# Altium PCB PCB_Sensores_PIC24.PcbDoc (part 2 of 2)
Units mm, origin at the board's own origin, x right, y up, seen from the top; angles counter-clockwise.
Board outline 86.12 x 83.94 mm, 4 copper layers (Top Layer, Layer 1, Layer 4, Bottom Layer), stack 0.603 mm thick; 128 components, 84 nets, 499 pads, 63 vias.
Unrouted connection lines stored in the file: 68.
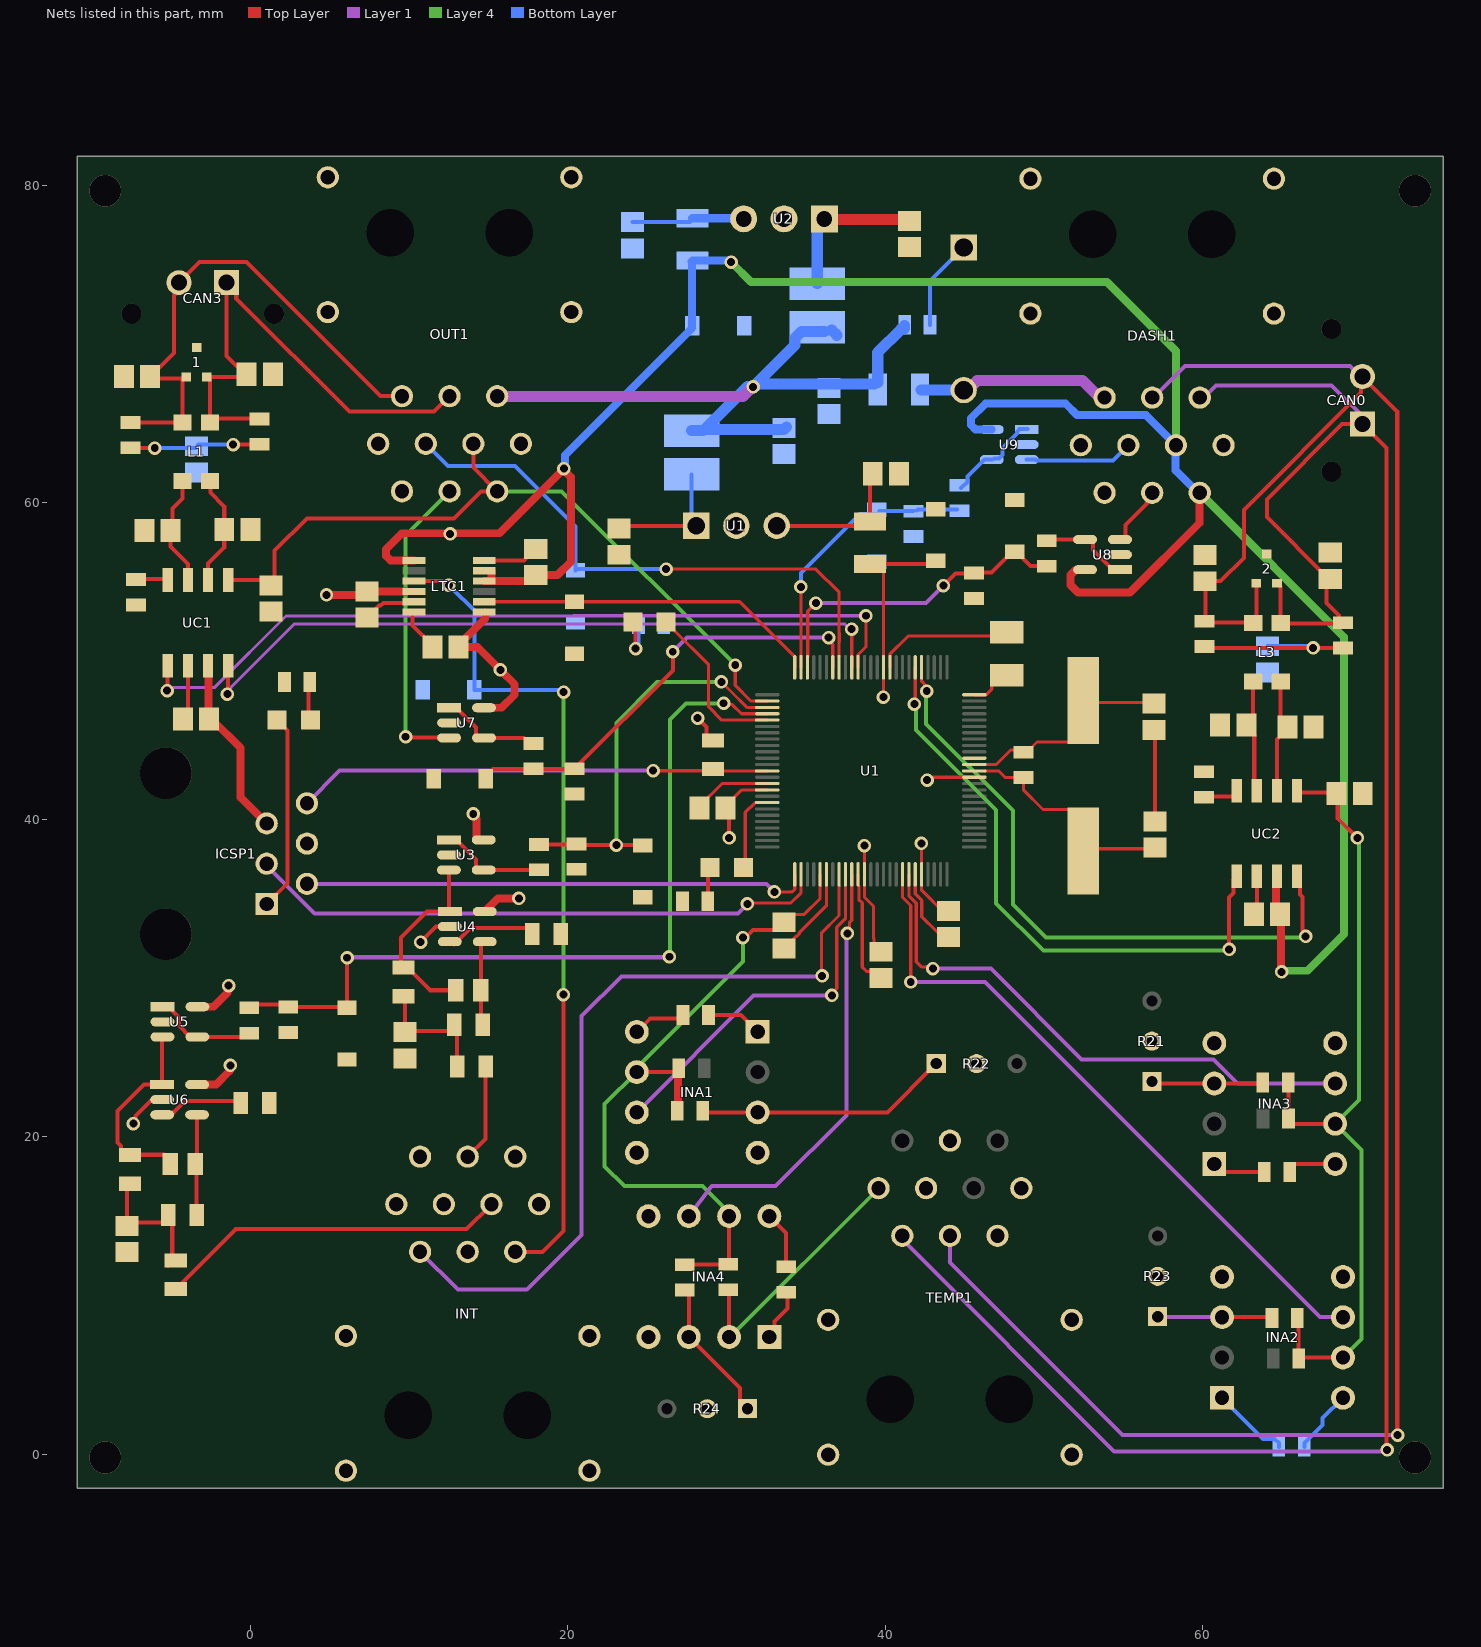
[diagram p4: the nets of this part, all layers, seen from the top]

## Via types
v1: diameter 0.85, hole 0.5, Top Layer to Bottom Layer, 59 vias
v2: diameter 2, hole 2, Top Layer to Bottom Layer, 4 vias

## Nets (pads, with @x,y where several pads share a name; then routed paths per layer and width w, separated by ;. In a path a pad name is that pad's centre, name@x,y a point inside that pad or via, vN(x,y) a via of type N, cw(c..) or ccw(c..) an arc to the next point about the centre after c; other vN are vias at no path point) (continued)
3.3V: C7.1 C8.1 C10.1 C15.1 CC3.2 CC4.2 F2.2 INA1.7 INA2.7 INA3.7 INA4.7 OUT1.3 OUT1.6 R1.1 R13.2 R14.1 R15.2 R16.1 R17.2 R18.1 R19.2 R20.1 U1.2@32.57,47.48 U1.16 U1.30 U1.37 U1.46 U1.62 U1.86 UC1.5 UC2.5 Z2.1 | length 178.2
  Top Layer w0.2: C8.1@29.98,41.09 30.179,41.09 30.969,41.88 U1.16@32.57,41.88 ; v1(30.55,49.74) 30.55,48.47 31.534,47.486 31.889,47.486 31.895,47.48 U1.2@32.57,47.48 ; C15.1@33.61,33.536 34.092,34.018 34.878,34.018 35.895,35.035 U1.30@35.895,36.555 ; v1@38.695,38.365 U1.37@38.695,36.555 38.695,35.105 39.272,34.528 39.272,32.518 39.304,32.486 39.304,31.876 C10.1@39.67,31.51 ; F2.2@39.423,56.126 39.895,55.655 U1.86@39.895,49.605 v1@39.895,47.742 ; v1@42.295,38.501 U1.46@42.295,36.555 42.295,35.88 42.295,35.55 42.802,35.043 43.329,34.516 C7.1@43.43,34.516 ; v1(42.64,42.5) 42.816,42.5 42.996,42.68 U1.62@45.62,42.68
  Top Layer w0.254: UC1.5@-1.415,54.685 UC1.5@-1.415,55.11 0.59,55.11 CC3.2@0.691,55.211 ; CC3.2@1.515,54.89 1.515,56.965 3.54,58.99 12.82,58.99 14.53,60.7 OUT1.3@15.54,60.7 14.04,62.2 OUT1.6@14.04,63.56 ; INA1.7@24.46,23.96 24.59,24.09 26.75,24.09 26.94,24.28 R16.1@26.99,24.33 ; R19.2@27.37,11.95 R20.1@30.11,11.95 ; v1(28.18,46.41) 28.75,45.84 28.75,45.323 29.073,45 R1.1@29.14,45 ; C8.1@29.94,40.75 30.16,40.53 v1(30.16,38.86) ; R20.1@30.11,11.97 30.16,12.02 INA4.7@30.16,15.01 ; v1(31.03,32.57) 31.191,32.57 31.657,33.035 33.11,33.035 C15.1@33.61,33.536 ; v1(38.689,38.371) v1@38.695,38.365 ; F2.2@39.05,56.126 39.423,56.126 Z2.1@42.963,56.126 ; v1(39.888,47.735) v1@39.895,47.742 ; v1(42.282,38.513) v1@42.295,38.501 ; Z2.1@42.954,56.253 Z2.1@43.09,56.39 ; R13.2@65.29,23.32 65.42,23.19 R14.1@65.42,21.17 65.42,21.103 65.693,20.83 INA3.7@68.37,20.83 68.41,20.83 INA3.7@68.61,21.03 ; UC2.5@65.95,41.73 68.055,41.73 CC4.2@68.07,41.745 ; R17.2@66.1,8.59 66.07,8.56 R18.1@66.07,6.04 66.13,6.1 INA2.7@68.86,6.1 69.11,6.1 INA2.7@69.13,6.08 ; CC4.2@68.454,41.65 68.53,41.574 68.53,40.09 v1(69.77,38.85)
  Top Layer w0.5: R15.2@26.89,21.655 26.94,21.705 R16.1@26.94,24.28
  Layer 4 w0.254: OUT1.3@15.65,60.77 15.72,60.7 19.59,60.7 v1(30.55,49.74) ; INA4.7@30.16,15.01 30.16,15.23 28.49,16.9 23.56,16.9 22.32,18.14 22.32,22.07 INA1.7@24.34,24.09 24.34,24.372 31.03,31.062 v1(31.03,32.57) ; INA3.7@68.5,20.7 70.02,19.18 70.02,7.26 INA2.7@68.86,6.1 ; INA3.7@68.52,20.72 68.52,20.98 69.88,22.34 69.88,38.74 v1(69.77,38.85)
4+: INA4.2 R20.2 TEMP1.7 | length 16.1
  Top Layer w0.254: R20.2@30.11,10.37 R20.2@30.16,10.32 ; INA4.2@30.16,7.39 R20.2@30.16,10.32 ; R20.2@30.167,10.313 R20.2@30.16,10.32
  Layer 4 w0.254: INA4.2@30.25,7.42 TEMP1.7@39.5,16.67
24V: C3.1 C4.1 F3.1 L2.1 L4.1 OUT1.10 RV1.1 | length 45.1
  Layer 1 w0.7: OUT1.10@15.6,66.69 31.039,66.69 31.639,67.29 v1(31.68,67.29)
  Bottom Layer w0.7: L2.1@27.8,64.525 28.525,64.525 L2.1@28.61,64.61 ; v1(31.68,67.29) 34.32,69.93 34.32,70.37 34.73,70.78 L4.1@36.17,70.78 ; v1@31.81,67.32 31.32,67.32 L2.1@28.61,64.61 ; v1@31.94,67.462 36.45,67.462 F3.1@39.308,67.462 ; C4.1@33.77,64.75 33.63,64.61 L2.1@28.61,64.61 ; L4.1@36.63,70.86 L4.1@36.947,70.543 ; F3.1@39.53,67.565 39.53,69.44 41.015,70.925 41.18,70.925 41.23,70.975 RV1.1@41.23,71.14
+5: C19.1 C20.1 C21.1 CC1.1 CC2.1 DASH1.3 DASH1.6 F1.2 ICSP1.5 INT.3 INT.6 INT.9 LTC1.1 LTC1.4 LTC1.5 LTC1.7 LTC1.10 U3.5 U4.5 U5.5 U6.5 U7.5 U8.5 U9.5 UC1.3 UC2.3 Z1.1 | length 196
  Top Layer w0.5: U6.5@-3.379,23.3 -2.19,23.3 -1.346,24.144 -1.346,24.445 v1(-1.279,24.512) ; U5.5@-3.36,28.21 -2.34,28.21 -1.458,29.092 -1.458,29.474 v1(-1.391,29.541) ; CC1.1@-2.66,46.55 -2.66,46.485 -2.45,46.275 -2.385,46.275 -0.63,44.52 -0.63,41.405 ICSP1.5@1.01,39.765 ; UC1.3@-2.66,49.39 -2.66,47.168 -2.655,47.163 CC1.1@-2.655,46.825 ; v1(4.781,54.179) 7.124,54.179 C19.1@7.34,54.396 7.345,54.39 LTC1.10@9.825,54.39 ; LTC1.7@10.298,56.345 8.828,56.345 8.535,56.638 8.535,57.052 9.543,58.06 v1@12.57,58.06 ; INT.3@10.541,18.76 INT.3@10.68,18.76 ; v1(12.57,58.02) v1@12.57,58.06 ; v1(14.03,40.37) 14.03,40.275 14.249,40.056 14.249,38.763 14.283,38.73 U3.5@14.697,38.73 ; U7.5@14.71,47.06 15.82,47.06 16.643,47.883 16.643,48.537 v1(15.74,49.44) 15.74,49.45 14.29,50.9 C20.1@13.106,50.9 13.106,51.001 14.79,52.685 LTC1.1@14.79,53.07 ; LTC1.4@14.722,55.045 LTC1.4@15.225,55.045 ; U4.5@14.756,34.21 15.592,35.046 v1(16.909,35.046) ; LTC1.5@15.184,55.67 15.184,55.086 LTC1.4@15.225,55.045 ; C21.1@18.136,55.59 C21.1@17.97,55.424 ; U8.5@52.6,55.762 52.586,55.748 52.005,55.748 51.69,55.433 51.69,54.792 52.16,54.322 55.432,54.322 59.803,58.693 59.803,60.583 DASH1.3@59.83,60.61 ; UC2.3@64.65,36.05 64.65,34.286 64.943,33.993 64.943,30.457 v1(64.99,30.41) ; v1@12.57,58.06 15.68,58.06 v1(19.75,62.13) 19.75,62.035 20.19,61.595 20.19,56.27 19.344,55.424 C21.1@17.97,55.424 ; LTC1.4@15.225,55.045 17.199,55.045 17.201,55.047 17.593,55.047 C21.1@17.97,55.424
  Layer 4 w0.5: v1(30.291,75.15) 31.541,73.9 53.98,73.9 58.33,69.55 DASH1.6@58.33,63.61 ; DASH1.3@60.076,60.316 60.124,60.316 68.93,51.51 68.93,32.78 66.627,30.477 65.057,30.477 v1(64.99,30.41)
  Bottom Layer w0.5: v1(19.75,62.13) 19.817,62.197 19.817,62.977 27.835,70.995 Z1.1@27.835,71.15 27.835,75.145 F1.2@27.79,75.19 ; F1.2@27.85,75.246 30.1,75.246 30.21,75.136 v1@30.21,75.07 ; U9.5@46.72,64.6 45.69,64.6 45.397,64.893 45.397,65.307 46.32,66.23 51.38,66.23 52.1,65.51 56.43,65.51 DASH1.6@58.33,63.61 ; DASH1.6@58.31,63.51 58.31,62.01 DASH1.3@59.81,60.51
AN_AUX1: R38.1 R39.1 U1.98 Z7.1 | length 19.1
  Top Layer w0.2: U1.98@35.118,50.253 35.118,53.138 v1(35.632,53.652)
  Top Layer w0.254: v1(43.675,54.752) 44.443,55.52 R39.1@45.41,55.52 ; R39.1@45.92,55.58 46.7,55.58 48.005,56.885 Z7.1@48.16,56.885 ; Z7.1@48.37,56.76 48.44,56.76 48.643,56.557 48.643,56.511 49.174,55.98 R38.1@50.18,55.98
  Layer 1 w0.254: v1(35.632,53.652) 42.575,53.652 v1(43.675,54.752)
AN_AUX2: R40.1 R41.1 U1.99 Z8.1 | length 17.2
  Top Layer w0.2: v1(34.68,54.68) 34.695,54.665 U1.99@34.695,49.605
  Bottom Layer w0.254: v1(34.68,54.68) 34.68,55.54 38.42,59.28 Z8.1@39.72,59.28 ; Z8.1@39.63,59.45 R41.1@41.78,59.45 ; R41.1@41.99,59.48 42.06,59.55 R40.1@44.53,59.55
AUX: INT.10 U1.33 | length 48.7
  Top Layer w0.2: v1(36.02,30.16) 35.98,30.2 35.98,32.853 37.086,33.959 U1.33@37.086,35.8
  Layer 1 w0.254: INT.10@10.68,12.76 13.07,10.37 17.405,10.37 20.865,13.83 20.865,27.615 23.37,30.12 35.98,30.12 v1(36.02,30.16)
AUX1: DASH1.2 U8.3 | length 3.8
  Top Layer w0.254: U8.3@54.801,57.662 54.993,57.662 55.14,57.809 55.14,58.58 56.49,59.93 56.49,59.96 56.93,60.4 DASH1.2@56.96,60.4
AUX2: DASH1.5 U9.3 | length 6.8
  Bottom Layer w0.254: U9.3@48.921,62.7 49.474,62.7 49.541,62.633 54.353,62.633 55.19,63.47 DASH1.5@55.35,63.47
CANH_0: 2.1 CAN0.2 CHB4.1 DASH1.9 L3.3 RCH2.2 TEMP1.9 | length 141.7
  Top Layer w0.254: CHB4.1@60.15,55.034 61.144,55.034 62.61,56.5 62.61,59.54 69.993,66.923 69.993,67.848 CAN0.2@70.085,67.94 CAN0.2@70.085,67.811 ; RCH2.2@60.19,52.47 60.2,52.48 CHB4.1@60.2,54.86 ; RCH2.2@60.51,52.44 L3.3@63.18,52.44 ; L3.3@63.2,52.39 63.4,52.59 63.4,54.81 2.1@63.52,54.93 ; CAN0.2@70.29,67.82 70.29,67.735 72.28,65.745 72.28,1.232 v1(72.302,1.21)
  Layer 1 w0.254: TEMP1.9@44.08,13.77 44.08,12.09 54.96,1.21 v1(72.302,1.21) ; DASH1.9@56.81,66.51 58.91,68.61 69.316,68.61 69.986,67.94 CAN0.2@70.085,67.94
CANH_3: 1.1 CAN3.2 CHB2.1 L1.3 OUT1.8 RCH1.2 | length 32.4
  Top Layer w0.254: RCH1.2@-7.048,65.04 L1.3@-4.295,65.04 -4.295,67.705 1.1@-4.215,67.785 ; CHB2.1@-6.298,67.867 -5.937,68.228 -5.937,68.323 -4.84,69.42 -4.84,73.053 -4.772,73.121 -4.772,73.608 CAN3.2@-4.52,73.86 ; CHB2.1@-6.25,67.82 -4.25,67.82 1.1@-4.215,67.785 ; CAN3.2@-4.36,74.03 -4.35,74.03 -3.23,75.15 -0.26,75.15 8.19,66.7 OUT1.8@9.54,66.7 ; 1.1@-4.17,67.74 1.1@-4.215,67.785 ; 1.1@-4.17,67.82 1.1@-4.01,67.82
CANL_0: 2.2 CAN0.1 CLB4.1 DASH1.10 L3.2 RCL2.2 TEMP1.10 | length 138.8
  Top Layer w0.254: 2.2@64.72,55.04 64.72,54.905 64.93,54.695 L3.2@64.93,52.39 64.95,52.37 RCL2.2@68.87,52.37 ; RCL2.2@68.733,52.41 68.6,52.543 68.6,52.88 67.83,53.65 67.83,55.313 64.07,59.073 64.07,60.2 68.81,64.94 CAN0.1@70.085,64.94 71.6,63.425 71.6,0.89 71.609,0.881 71.609,0.311 v1(71.64,0.28)
  Layer 1 w0.254: TEMP1.10@40.57,13.54 TEMP1.10@41.08,13.54 ; TEMP1.10@41.08,13.77 TEMP1.10@41.08,13.54 ; DASH1.10@59.81,66.51 59.982,66.51 60.852,67.38 68.145,67.38 CAN0.1@70.655,64.87 ; v1(71.64,0.28) 71.54,0.18 54.44,0.18 TEMP1.10@41.08,13.54
CANL_3: 1.2 CAN3.1 CLB2.1 L1.2 OUT1.9 RCL1.2 | length 33.1
  Top Layer w0.254: 1.2@-2.755,67.915 CLB2.1@-0.48,67.915 ; 1.2@-2.69,67.87 -2.565,67.745 L1.2@-2.565,65.07 ; L1.2@-2.4,65.07 -2.18,65.29 RCL1.2@0.404,65.29 ; CLB2.1@-0.48,67.83 CLB2.1@-0.48,67.915 ; CLB2.1@-0.21,67.915 CLB2.1@-0.13,67.995 ; OUT1.9@12.54,66.7 11.563,65.723 6.237,65.723 -0.91,72.87 -0.91,73.25 CAN3.1@-1.3,73.64 ; CAN3.1@-1.52,73.86 CAN3.1@-1.3,73.64 ; CAN3.1@-1.52,73.86 -1.3,73.86 CAN3.1@-1.3,73.64 ; CAN3.1@-1.52,73.86 -1.52,69.225 -0.48,68.185 CLB2.1@-0.48,67.915
CAUDAL_A: LTC1.2 U1.100 Z10.1 | length 21.7
  Top Layer w0.2: LTC1.2@14.722,53.745 20.58,53.745 30.825,53.745 34.295,50.275 U1.100@34.295,49.605
CAUDAL_P: INT.8 LTC1.9 Z6.1 | length 52.9
  Top Layer w0.254: LTC1.9@10.297,55.044 12.074,55.044 12.339,54.78 v1(12.5,54.78) ; INT.8@16.68,12.76 18.41,12.76 19.71,14.06 v1(19.71,28.975)
  Layer 4 w0.254: v1(19.71,28.975) v1@19.71,48.176
  Bottom Layer w0.254: v1@12.66,54.78 12.66,54.62 14.105,53.175 Z6.1@14.105,48.19 19.429,48.19 19.571,48.048 v1(19.733,48.048)
DIRECCION: OUT1.5 U1.93 Z9.1 | length 35.7
  Top Layer w0.2: v1(26.19,55.8) 35.633,55.8 37.095,54.338 37.095,51.766 37.108,51.753 37.108,51.194 37.095,51.181 U1.93@37.095,50.253
  Bottom Layer w0.254: OUT1.5@11.04,63.7 12.43,62.31 16.66,62.31 20.48,58.49 Z9.1@20.48,55.725 20.518,55.762 20.555,55.8 v1(26.19,55.8)
GND: 1.3 2.3 C1.2 C2.2 C3.2 C4.2 C5.2 C6.2 C7.2 C8.2 C10.2 C13.2 C14.2 C15.2 C16.2 C19.2 C20.2 C21.2 C24.2 CAP1.1 CB1.2 CB2.2 CC1.2 CC2.2 CC3.1 CC4.1 CHB1.2 CHB2.2 CHB3.2 CHB4.2 CLB1.2 CLB2.2 CLB3.2 CLB4.2 DASH1.1 DASH1.4 DASH1.7 DASH1.MH1 DASH1.MH2 DASH1.MH5 DASH1.MH6 DR1.1 ICSP1.4 INA1.4 INA1.5 INA2.4 INA2.5 INA3.4 INA3.5 INA4.4 INA4.5 INT.1 INT.4 INT.7 INT.MH1 INT.MH2 INT.MH5 INT.MH6 LTC1.6 LTC1.11 LTC1.12 OUT1.1 OUT1.4 OUT1.7 OUT1.MH1 OUT1.MH2 OUT1.MH5 OUT1.MH6 R2.2 R3.2 R6.1 R7.1 R8.1 R10.2 R21.2 R22.2 R23.2 R24.2 R31.2 R32.2 R33.2 R37.2 R39.2 R41.2 RV1.2 TEMP1.2 TEMP1.4 TEMP1.6 TEMP1.8 TEMP1.MH1 TEMP1.MH2 TEMP1.MH5 TEMP1.MH6 U1.2@30.62,58.53 U1.15 U1.31 U1.36 U1.45 U1.65 U1.75 U2.2 U3.2 U4.2 U5.2 U6.2 U7.2 U8.2 U9.2 UC1.2 UC2.2 Z1.2 Z2.2 Z3.2 Z4.2 Z5.2 Z6.2 Z7.2 Z8.2 Z9.2 Z10.2 | length 54.2
  Top Layer w0.2: C8.2@28.288,40.75 28.288,40.851 29.718,42.28 U1.15@31.922,42.28 ; C15.2@33.61,31.884 33.711,31.884 34.238,32.412 34.238,32.512 34.384,32.658 34.442,32.658 34.588,32.805 34.588,32.862 36.295,34.569 U1.31@36.295,35.907 ; U1.36@38.295,36.555 38.295,35.88 38.345,35.83 38.345,34.96 38.55,34.755 38.55,30.71 38.819,30.441 39.102,30.441 39.457,30.086 C10.2@39.457,29.803 ; U1.45@41.899,35.907 41.899,35.328 42.31,34.917 42.31,33.883 43.329,32.864 C7.2@43.43,32.864 ; U1.75@45.62,47.88 46.37,47.88 46.722,48.232 46.722,48.537 47.195,49.01 CAP1.1@47.66,49.01
  Top Layer w0.254: v1(-7.387,20.838) -7.273,20.952 -7.273,21.307 -6.291,22.289 -5.641,22.289 U6.2@-5.58,22.35 ; CC1.2@-3.955,46.701 UC1.2@-3.955,49.71 ; C19.2@7.34,52.744 7.441,52.744 7.941,53.245 7.941,53.343 8.09,53.491 8.183,53.491 8.361,53.67 LTC1.11@9.703,53.67 ; LTC1.12@10.2,53.08 10.2,52.255 11.454,51.001 C20.2@11.454,50.9 ; v1(10.709,32.286) 11.682,33.26 U4.2@12.555,33.26 ; LTC1.6@14.712,56.335 17.22,56.335 17.369,56.484 17.369,56.575 17.869,57.076 C21.2@17.97,57.076 ; C14.2@57.01,39.896 57.01,45.75 C13.2@57.02,45.76 ; UC2.2@63.34,36.16 63.425,36.075 63.425,34.12 CC2.2@63.345,34.04
  Bottom Layer w0.254: RV1.2@42.83,71.2 42.83,73.96 44.94,76.07 DR1.1@44.94,76.09
  other v2: -9.16,-0.2 73.4,-0.2 -9.16,79.65 73.4,79.65
LED_0: D3.1 U1.18 | length 5.2
  Top Layer w0.2: D3.1@31.07,36.99 31.18,37.1 31.18,40.46 31.8,41.08 U1.18@32.57,41.08
LED_1: D4.1 U1.5 | length 10.5
  Top Layer w0.2: D4.1@26.19,52.45 26.69,51.95 28.87,49.77 28.87,47.115 29.705,46.28 U1.5@32.57,46.28
MCLR: ICSP1.6 R1.2 U1.13 | length 29.6
  Top Layer w0.2: v1(25.37,43.09) 29.03,43.09 R1.2@29.14,43.2 ; R1.2@29.44,43.14 29.5,43.08 U1.13@32.57,43.08
  Layer 1 w0.254: ICSP1.6@3.55,41.035 5.605,43.09 v1(25.37,43.09)
NetC1_1: C1.1 L4.2 U2.1 | length 9.9
  Top Layer w0.254: C1.1@41.446,77.84 C1.1@41.54,77.746
  Top Layer w0.7: U2.1@35.97,77.84 C1.1@41.446,77.84
  Bottom Layer w0.254: U2.1@35.72,78 U2.1@35.76,78.04
  Bottom Layer w0.7: L4.2@35.72,73.795 U2.1@35.72,78
NetC2_1: C2.1 F1.1 U2.3 | length 7
  Bottom Layer w0.254: C2.1@24.08,77.672 27.692,77.672 F1.1@27.82,77.8 ; F1.1@27.85,77.913 F1.1@27.856,77.92 ; U2.3@30.45,77.92 U2.3@30.89,77.48
  Bottom Layer w0.555: F1.1@27.856,77.92 U2.3@30.45,77.92
NetC5_1: C5.1 L2.2 U1.1@28.08,58.53 | length 8.3
  Top Layer w0.254: C5.1@23.11,58.53 U1.1@28.08,58.53 ; C5.1@23.18,58.65 C5.1@23.21,58.68
  Bottom Layer w0.254: L2.2@27.8,61.775 27.8,58.79 U1.1@28.02,58.57
NetC6_1: C6.1 F2.1 U1.3@33.16,58.53 | length 9.5
  Top Layer w0.254: U1.3@33.16,58.53 38.83,58.53 F2.1@39.05,58.75 ; F2.1@39.05,58.793 39.05,62.16 C6.1@39.12,62.23
  Bottom Layer w0.254: U1.3@33.16,58.69 U1.3@33.19,58.66
NetC9_1: C9.1 R29.2 U4.4 | length 5.7
  Top Layer w0.254: R29.2@14.726,27.15 14.506,27.37 C9.1@14.506,29.25 14.506,32.163 14.753,32.41 U4.4@15.016,32.41
NetC9_2: C9.2 R5.2 U3.3 U4.1 | length 12.1
  Top Layer w0.254: R5.2@9.796,30.68 R5.2@9.636,30.68 9.49,30.826 9.49,32.57 11.13,34.21 U4.1@12.555,34.21 ; R5.2@9.886,30.68 11.316,29.25 C9.2@12.926,29.25 ; U4.1@12.496,34.36 12.496,36.89 U3.3@12.546,36.94
NetC16_1: C16.1 R5.1 R28.2 R29.1 | length 7.9
  Top Layer w0.254: R5.1@9.666,28.72 9.736,28.65 C16.1@9.736,26.606 ; C16.1@9.886,26.67 12.503,26.67 12.826,26.993 R29.1@12.826,27.08 ; R28.2@12.786,24.59 R28.2@12.886,24.49 ; R29.1@12.846,26.88 13.016,26.71 R28.2@13.016,24.45
NetC18_1: C18.1 R35.2 U6.4 | length 6.9
  Top Layer w0.254: R35.2@-3.73,14.62 -3.407,14.943 -3.407,17.983 C18.1@-3.32,18.07 ; C18.1@-3.49,18.3 -3.379,18.411 -3.379,21.529 U6.4@-3.39,21.54
NetC18_2: C18.2 R30.2 U5.3 U6.1 | length 12.4
  Top Layer w0.254: R30.2@-7.6,18.86 -7.85,18.86 -8.173,19.183 -8.173,19.433 -8.38,19.64 -8.38,21.64 -6.72,23.3 U6.1@-5.58,23.3 -5.58,26.163 -5.493,26.25 U5.3@-5.48,26.25 ; R30.2@-7.6,18.88 -5.435,18.88 -5.13,18.575 C18.2@-5.13,18.5
NetC24_1: C24.1 R30.1 R34.2 R35.1 | length 8.1
  Top Layer w0.254: R30.1@-7.79,17.015 -7.79,14.62 R35.1@-5.53,14.62 ; R34.2@-5.2,11.88 -4.943,12.137 -4.943,14.833 R35.1@-5.2,15.09
NetCB1_1: CB1.1 RCH1.1 RCL1.1 | length 8
  Top Layer w0.254: RCH1.1@-7.58,63.44 -6.059,63.44 v1(-6.044,63.425) ; v1(-1.1,63.65) -1.09,63.66 RCL1.1@0.55,63.66
  Bottom Layer w0.254: v1(-6.044,63.425) -3.505,63.425 CB1.1@-3.46,63.47 ; CB1.1@-3.33,63.62 -3.3,63.65 v1(-1.1,63.65)
NetCB2_1: CB2.1 RCH2.1 RCL2.1 | length 11.5
  Top Layer w0.254: RCH2.1@60.13,50.92 60.23,50.82 RCL2.1@68.63,50.82
  Bottom Layer w0.254: CB2.1@64.1,50.936 66.866,50.936 v1(66.974,50.828)
NetCHB1_1: CHB1.1 L1.4 UC1.7 | length 7
  Top Layer w0.254: CHB1.1@-5.05,58.24 -5.05,58.02 -5.05,57.21 -3.955,56.115 UC1.7@-3.955,55.11 ; CHB1.1@-4.93,58.24 -4.93,59.612 -4.295,60.247 L1.4@-4.295,61.36
NetCHB3_1: CHB3.1 L3.4 UC2.7 | length 7.1
  Top Layer w0.254: CHB3.1@62.86,45.83 63.2,46.17 L3.4@63.2,48.71 ; CHB3.1@62.9,45.65 62.975,45.65 63.266,45.359 63.266,41.989 UC2.7@63.425,41.83
NetCLB1_1: CLB1.1 L1.1 UC1.6 | length 7
  Top Layer w0.254: UC1.6@-2.685,55.11 -2.685,56.145 -1.666,57.164 CLB1.1@-1.666,58.3 -1.666,59.756 -2.538,60.628 -2.538,61.333 L1.1@-2.565,61.36
NetCLB3_1: CLB3.1 L3.1 UC2.6 | length 7.3
  Top Layer w0.254: UC2.6@64.695,41.83 64.695,45.06 65.305,45.67 CLB3.1@65.34,45.67 ; L3.1@64.93,48.71 64.93,46.12 CLB3.1@65.34,45.71
NetD2_2: D2.2 R6.2 | length 1.9
  Top Layer w0.254: R6.2@3.57,48.67 3.65,48.59 D2.2@3.65,46.79
NetD3_2: D3.2 R7.2 | length 2.1
  Top Layer w0.254: R7.2@28.82,34.86 28.82,36.71 D3.2@28.98,36.87
NetD4_2: D4.2 R8.2 | length 3.5
  Top Layer w0.254: D4.2@24.12,52.57 24.265,52.425 v1(24.265,50.792)
  Bottom Layer w0.254: v1(24.265,50.792) 24.45,50.977 R8.2@24.45,52.26 ; R8.2@24.415,52.225 R8.2@24.45,52.26 ; R8.2@24.45,52.33 R8.2@24.45,52.26
NetDASH1_8: DASH1.8 DR1.2 F3.2 | length 12.3
  Layer 1 w0.7: DR1.2@44.95,67.08 45.207,67.08 45.807,67.68 52.451,67.68 53.387,66.744 53.576,66.744 DASH1.8@53.81,66.51
  Bottom Layer w0.7: F3.2@42.27,67.08 DR1.2@44.95,67.08
NetINA1_1: INA1.1 R11.2 | length 3.5
  Top Layer w0.254: R11.2@28.86,27.69 30.9,27.69 INA1.1@31.96,26.63
NetINA1_8: INA1.8 R11.1 | length 3.3
  Top Layer w0.254: INA1.8@24.34,26.63 25.19,27.48 R11.1@27.275,27.48
NetINA2_1: INA2.1 R12.2 | length 5
  Bottom Layer w0.254: INA2.1@61.24,3.56 63.832,0.968 64.547,0.968 64.82,0.695 R12.2@64.82,0.47
NetINA2_8: INA2.8 R12.1 | length 4.1
  Bottom Layer w0.254: R12.1@66.42,0.47 66.42,0.695 67.573,1.848 67.573,2.273 INA2.8@68.86,3.56
NetINA3_1: INA3.1 R25.2 | length 3.3
  Top Layer w0.254: INA3.1@60.78,18.16 61.14,17.8 R25.2@63.9,17.8
NetINA3_8: INA3.8 R25.1 | length 3.3
  Top Layer w0.254: R25.1@65.5,17.8 65.5,18.017 65.773,18.29 68.39,18.29 INA3.8@68.47,18.21
NetINA4_1: INA4.1 R26.2 | length 3.2
  Top Layer w0.254: INA4.1@32.7,7.39 33.012,7.702 33.012,8.372 33.83,9.19 R26.2@33.83,10.1
NetINA4_8: INA4.8 R26.1 | length 3.5
  Top Layer w0.254: INA4.8@32.88,14.91 32.88,14.83 33.76,13.95 R26.1@33.76,11.82
NetR2_1: R2.1 UC1.8 | length 1.8
  Top Layer w0.254: R2.1@-7.08,55.16 -5.26,55.16 UC1.8@-5.24,55.18
NetR3_1: R3.1 UC2.8 | length 2.2
  Top Layer w0.254: R3.1@60.09,41.47 62.06,41.47 UC2.8@62.22,41.63
NetR9_2: R9.2 U7.1 U7.4 | length 6.5
  Top Layer w0.254: U7.1@12.63,47.15 12.886,47.15 14.209,45.827 14.209,45.307 14.356,45.16 U7.4@14.71,45.16 17.245,45.16 17.575,44.83 R9.2@17.89,44.83
NetR10_1: R10.1 U4.3 | length 5.9
  Top Layer w0.254: U4.3@12.816,32.13 13.866,33.18 17.617,33.18 17.94,32.857 R10.1@17.94,32.68
NetR27_2: R27.2 U3.1 U3.4 | length 6.2
  Top Layer w0.254: U3.1@12.786,38.74 12.952,38.74 14.195,37.497 14.195,36.977 14.342,36.83 U3.4@14.697,36.83 ; U3.4@15.016,36.83 18.176,36.83 R27.2@18.186,36.84
NetR32_1: R32.1 U6.3 | length 5.2
  Top Layer w0.254: U6.3@-5.58,21.4 -5.027,21.4 -4.868,21.559 -4.841,21.559 -4.14,22.26 R32.1@-0.722,22.26
NetR36_2: R36.2 U5.1 U5.4 | length 6.9
  Top Layer w0.254: U5.1@-5.36,28.37 -4.531,27.541 -4.531,27.015 -3.826,26.31 U5.4@-3.36,26.31 0,26.31 R36.2@0.26,26.57
NetR38_2: R38.2 U8.1 U8.4 | length 5.5
  Top Layer w0.254: R38.2@50.18,57.58 50.262,57.662 52.438,57.662 U8.4@52.5,57.6 ; U8.4@52.79,57.59 53.026,57.59 53.101,57.515 53.101,56.995 54.334,55.762 U8.1@54.801,55.762
NetR40_2: R40.2 U9.1 U9.4 | length 6
  Bottom Layer w0.254: R40.2@44.79,60.91 45.178,61.298 45.178,61.625 46.253,62.7 U9.4@46.72,62.7 ; U9.4@46.901,62.776 47.176,62.776 47.403,63.002 47.403,63.443 48.295,64.335 48.295,64.441 48.48,64.626 U9.1@48.982,64.626
OSC1: "OSC 1.2" C14.1 R4.2 U1.63 | length 14.8
  Top Layer w0.2: U1.63@46.268,43.076 47.144,43.076 47.56,42.66 R4.2@48.71,42.66 48.71,41.879 49.946,40.643 51.617,40.643 52.49,39.77 52.49,38.02 52.64,38.17 C14.1@57.47,38.17
OSC2: "OSC 1.1" C13.1 R4.1 U1.64 | length 14
  Top Layer w0.2: U1.64@45.62,43.48 46.994,43.48 47.902,44.388 48.582,44.388 R4.1@48.71,44.26 ; R4.1@48.877,44.202 49.572,44.897 51.617,44.897 52.49,45.77 52.49,47.52 52.626,47.384 C13.1@56.87,47.384
PGC: ICSP1.2 U1.26 | length 32
  Top Layer w0.2: v1(33.02,35.452) 34.146,35.452 34.295,35.601 U1.26@34.295,36.555
  Layer 1 w0.254: ICSP1.2@3.565,35.955 32.517,35.955 v1(33.02,35.452)
PGD: ICSP1.3 U1.27 | length 35.9
  Top Layer w0.2: v1(31.32,34.69) 31.38,34.75 34.046,34.75 34.699,35.403 U1.27@34.699,35.83
  Layer 1 w0.254: ICSP1.3@1.07,37.12 1.07,37.053 4.04,34.084 30.714,34.084 v1(31.32,34.69) v1@31.31,34.7
PGM: D2.1 ICSP1.1 | length 12.4
  Top Layer w0.254: ICSP1.1@1.01,34.685 2.32,35.995 2.32,45.63 D2.1@1.67,46.28
Rx_Can: U1.80 UC2.4 | length 40.7
  Top Layer w0.2: U1.80@42.295,49.605 42.295,48.725 42.496,48.524 42.496,48.234 v1(42.62,48.11)
  Top Layer w0.254: UC2.4@65.965,36.43 66.163,36.232 66.163,35.287 66.32,35.13 66.32,33.001 66.51,32.811 v1(66.51,32.65)
  Layer 4 w0.254: v1(42.62,48.11) 42.575,48.065 42.575,46.045 48.043,40.577 48.043,34.657 50.13,32.57 66.43,32.57 v1(66.51,32.65)
RX_CAN3: U1.91 UC1.4 | length 45.3
  Top Layer w0.2: U1.91@37.892,49.607 v1@37.892,51.952
  Top Layer w0.254: v1(-1.467,47.919) -1.441,47.945 -1.441,49.441 UC1.4@-1.45,49.45 ; v1@37.892,51.952 v1@37.94,52
  Layer 1 w0.2: v1@-1.55,48.04 -1.522,48.04 -1.256,48.306 -1.256,48.334 2.75,52.34 36.521,52.34 36.526,52.336 37.448,52.336 37.774,52.01 v1(37.89,52.01)
SD_amp: R27.1 R33.1 U1.3@32.57,47.08 Z4.1 | length 24.4
  Top Layer w0.2: v1(29.67,48.69) 30.279,48.081 31.28,47.08 U1.3@31.922,47.08
  Top Layer w0.254: R27.1@18.186,38.44 R33.1@20.041,38.44 ; R33.1@20.536,38.47 20.606,38.4 22.91,38.4 v1@23.02,38.29 ; v1(23.05,38.4) 24.54,38.4 Z4.1@24.65,38.29
  Layer 4 w0.254: v1(23.05,38.4) 23.05,46.11 25.63,48.69 v1(29.67,48.69)
SD_ruido: INT.2 R28.1 | length 6.1
  Top Layer w0.254: INT.2@13.68,18.76 14.79,19.87 R28.1@14.79,24.37
SI_amp: R36.1 R37.1 U1.4 Z5.1 | length 51.7
  Top Layer w0.2: v1(29.82,47.34) 29.903,47.257 30.363,47.257 30.94,46.68 U1.4@32.57,46.68
  Top Layer w0.254: R36.1@-0.09,28.14 0.12,28.35 R37.1@2.49,28.35 ; R37.1@2.37,28.19 6.05,28.19 6.08,28.22 v1(6.08,31.3) ; Z5.1@6.19,28.19 Z5.1@6.21,28.21
  Layer 1 w0.254: v1(6.08,31.3) 6.11,31.33 26.37,31.33 v1(26.4,31.36)
  Layer 4 w0.254: v1(26.4,31.36) 26.429,31.389 26.429,46.319 27.45,47.34 v1(29.82,47.34)
SI_ruido: INT.5 R34.1 | length 22.1
  Top Layer w0.254: R34.1@-4.72,10.42 -0.94,14.2 13.62,14.2 15.11,15.69 INT.5@15.2,15.69
T1: INA3.6 U1.44 | length 35.3
  Top Layer w0.2: U1.44@41.495,36.555 41.495,35.199 41.96,34.734 41.96,31.049 42.285,30.724 42.897,30.724 v1(43.01,30.611)
  Layer 1 w0.254: v1(43.01,30.611) 43.011,30.61 46.66,30.61 52.387,24.883 60.689,24.883 62.202,23.37 INA3.6@68.37,23.37
T2: INA1.6 U1.34 | length 22.7
  Top Layer w0.2: v1(36.64,28.92) 36.64,29.057 36.945,29.362 36.945,33.215 37.49,33.76 U1.34@37.49,35.872
  Layer 1 w0.254: INA1.6@24.34,21.55 31.71,28.92 v1(36.64,28.92)
T3: INA2.6 U1.43 | length 43
  Top Layer w0.2: U1.43@41.095,36.555 41.095,35.104 41.61,34.589 v1(41.61,29.77)
  Layer 1 w0.254: v1(41.61,29.77) 46.28,29.77 67.41,8.64 INA2.6@68.86,8.64
T4: INA4.6 U1.35 | length 28
  Top Layer w0.2: v1(37.62,32.84) 37.744,32.964 37.744,33.514 37.895,33.665 U1.35@37.895,36.555
  Layer 1 w0.254: INA4.6@27.62,15.01 29,16.82 29.012,16.832 29.086,16.907 33.097,16.907 37.547,21.357 37.547,32.767 v1(37.62,32.84)
Tx_Can: U1.81 UC2.1 | length 37.8
  Top Layer w0.2: v1(41.837,47.294) 41.895,47.352 U1.81@41.895,49.605
  Top Layer w0.254: v1(61.68,31.83) 61.68,35.1 61.957,35.377 61.957,36.232 UC2.1@62.155,36.43
  Layer 4 w0.254: v1(41.837,47.294) 41.95,47.181 41.95,45.65 46.99,40.61 46.99,34.73 49.975,31.745 61.595,31.745 v1(61.68,31.83)
TX_CAN3: U1.90 UC1.1 | length 50.7
  Top Layer w0.2: U1.90@38.295,49.605 38.295,50.413 38.79,50.908 v1(38.79,52.86)
  Top Layer w0.254: v1(-5.263,48.135) -5.244,48.154 -5.244,49.334 UC1.1@-5.26,49.35
  Layer 1 w0.2: v1(-5.263,48.135) -5.087,48.135 -4.892,48.33 -2.29,48.33 2.225,52.845 20.35,52.845 20.365,52.86 v1(38.79,52.86)
V1: INA3.3 R13.1 R21.1 | length 7
  Top Layer w0.254: R21.1@56.945,23.37 INA3.3@60.75,23.37 63.63,23.37 R13.1@63.71,23.45
  Layer 1 w0.254: R21.1@56.815,23.5 R21.1@56.945,23.37
V2: INA1.3 R15.1 R22.1 | length 16.2
  Top Layer w0.254: R15.1@28.49,21.655 28.595,21.55 INA1.3@31.96,21.55 40.145,21.55 43.055,24.46 R22.1@43.45,24.46
V3: INA2.3 R17.1 R23.1 | length 7.2
  Top Layer w0.254: INA2.3@61.24,8.64 64.32,8.64 R17.1@64.38,8.58
  Layer 1 w0.254: R23.1@57.18,8.67 57.21,8.64 INA2.3@61.24,8.64
V4: INA4.3 R19.1 R24.1 | length 9.1
  Top Layer w0.254: R19.1@27.37,10.35 27.62,10.1 INA4.3@27.62,7.39 30.847,4.163 30.847,3.343 R24.1@31.32,2.87
VCAP: CAP1.2 U1.85 | length 8.8
  Top Layer w0.2: U1.85@40.295,49.605 40.295,50.426 41.441,51.572 CAP1.2@47.76,51.572
ZRACK: OUT1.2 U7.3 | length 19.4
  Top Layer w0.254: v1(9.77,45.23) 9.805,45.195 12.474,45.195 U7.3@12.509,45.16
  Layer 4 w0.254: v1@9.96,45.28 9.77,45.47 9.77,57.93 OUT1.2@12.54,60.7
ZRACK-Reg: R9.1 R31.1 U1.94 Z3.1 | length 28.2
  Top Layer w0.2: v1@36.45,51.39 36.45,51.296 36.695,51.051 U1.94@36.695,49.605
  Top Layer w0.254: Z3.1@14.8,42.54 14.8,42.73 15.28,43.21 R9.1@17.82,43.21 20.5,43.21 R31.1@20.58,43.13 ; R31.1@20.42,43.22 26.609,49.409 v1(26.609,50.59)
  Layer 1 w0.254: v1(26.609,50.59) 27.493,51.474 v1(36.433,51.474)
pads on no net: CAN0. CAN3. DASH1.MH3 DASH1.MH4 ICSP1. INT.MH3 INT.MH4 LTC1.3 LTC1.8 OUT1.MH3 OUT1.MH4 R21.3 R22.3 R23.3 R24.3 TEMP1.MH3 TEMP1.MH4 U1.1@32.57,47.88 U1.6 U1.7 U1.8 U1.9 U1.10 U1.11 U1.12 U1.14 U1.17 U1.19 U1.20 U1.21 U1.22 U1.23 U1.24 U1.25 U1.28 U1.29 U1.32 U1.38 U1.39 U1.40 U1.41 U1.42 U1.47 U1.48 U1.49 U1.50 U1.51 U1.52 U1.53 U1.54 U1.55 U1.56 U1.57 U1.58 U1.59 U1.60 U1.61 U1.66 U1.67 U1.68 U1.69 U1.70 U1.71 U1.72 U1.73 U1.74 U1.76 U1.77 U1.78 U1.79 U1.82 U1.83 U1.84 U1.87 U1.88 U1.89 U1.92 U1.95 U1.96 U1.97

## Polygon pours and split planes (outlines as drawn)
GND on Top Layer "GND_L01_P010" (solid, pour order 10): -10.94,-2.13 -10.94,81.81 75.18,81.81 75.18,-2.13
GND on Bottom Layer "GND_L04_P011" (solid, pour order 11): -10.94,-2.13 -10.94,81.81 75.18,81.81 75.18,-2.13
GND on Layer 4 "GND_L03_P018" (solid, pour order 18): -10.94,-2.13 -10.94,81.81 75.18,81.81 75.18,-2.13
+5 on Layer 4 "+5_L03_P017" (solid, pour order 17): 19.64,59.04 19.64,-2.07 19.5,-2.21 -11.06,-2.21 -11.06,58.94 -10.96,59.04 19.68,59.04
GND on Layer 1 "GND_L02_P020" (solid, pour order 20): -10.94,-2.13 -10.94,81.81 75.18,81.81 75.18,-2.13
3.3V on Layer 1 "3.3V_L02_P019" (solid, pour order 19): 28.42,50.52 28.42,31.51 69.88,31.51 70.05,31.68 69.82,31.91 69.82,50.735 28.205,50.735

## Silkscreen, mask and mechanical layers (free items; w line width, h text height)
Top Overlay:
  region: 195 vertices and 41 holes, not listed, extent -6.774,-1.086 1.535,8.699